# Altium PCB LED_v2.PcbDoc
Units mm, origin at the board's own origin, x right, y up, seen from the top; angles counter-clockwise.
Board outline 120 x 30 mm, 2 copper layers (Top Layer, Bottom Layer), stack 1.58 mm thick; 51 components, 38 nets, 139 pads, 151 vias.
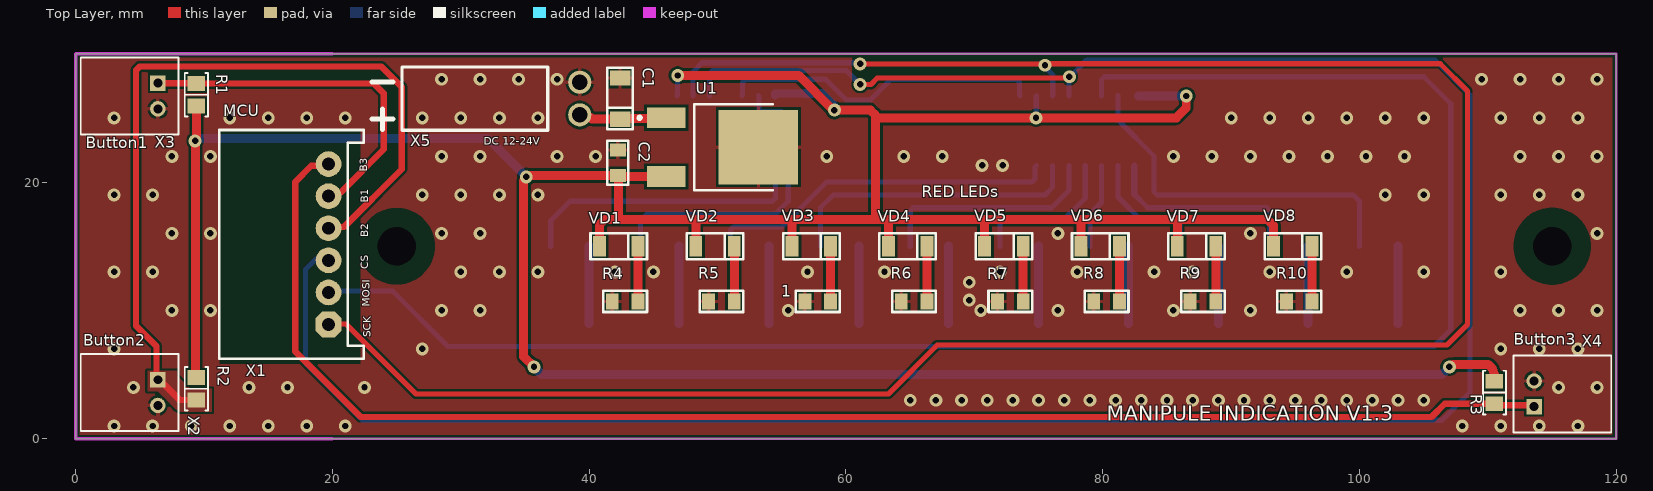
[diagram p0: Top Layer view]
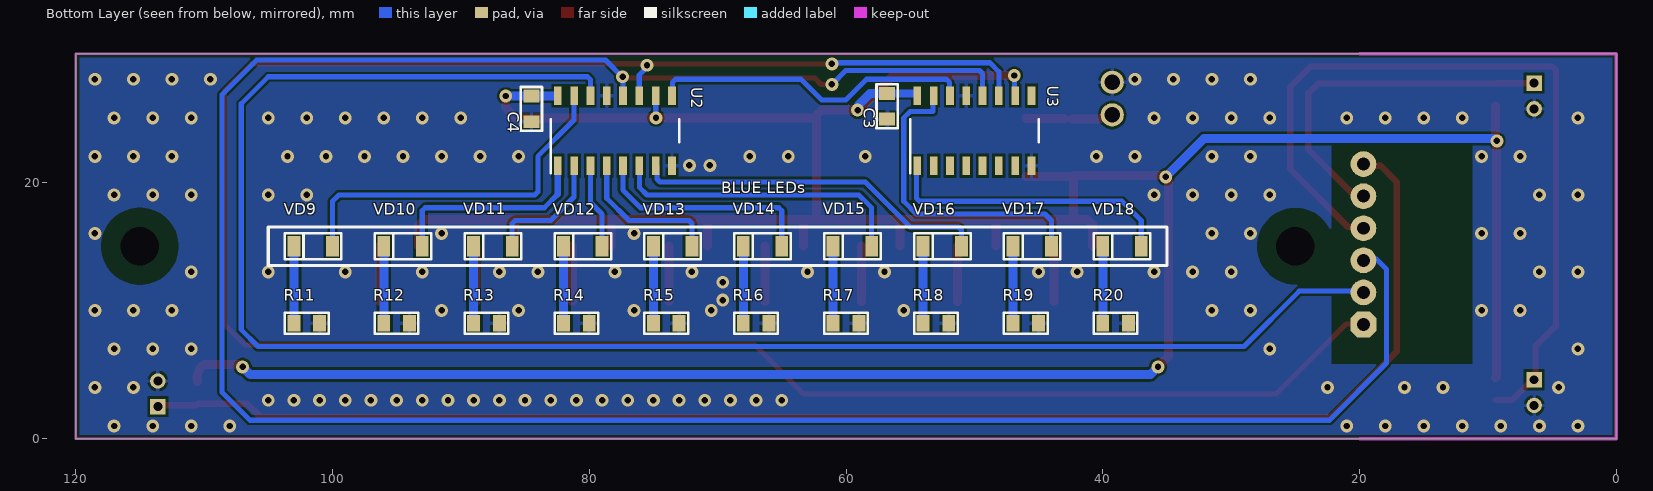
[diagram p1: Bottom Layer view, seen from below]
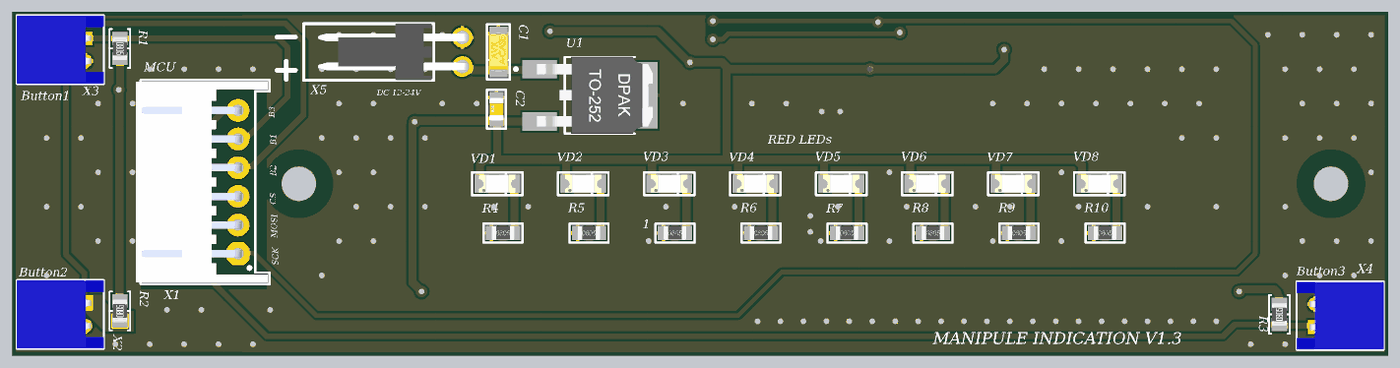
[diagram p2: 3D render of the assembled board from above, using the file's embedded part models]
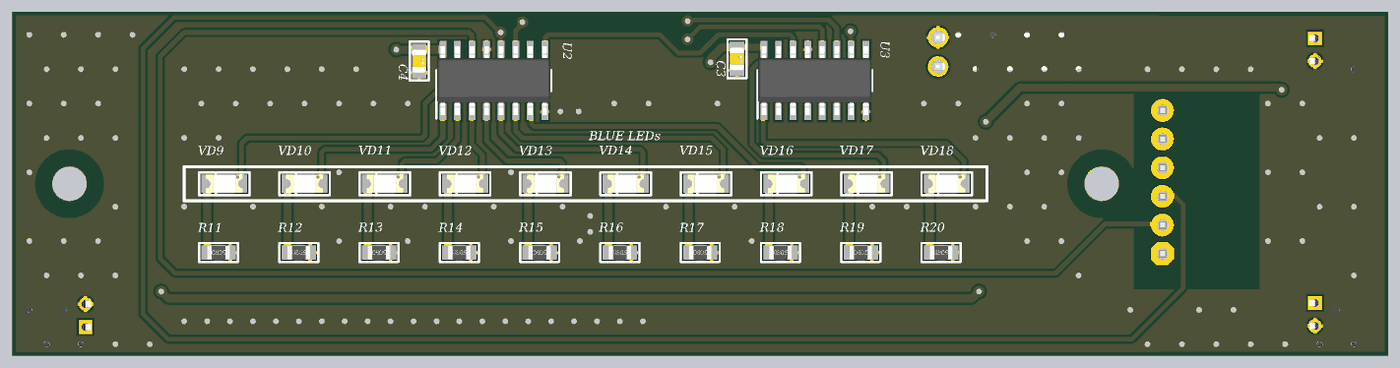
[diagram p3: 3D render of the assembled board from below, using the file's embedded part models]

## Layer stack, top to bottom
Top Solder: solder mask 0.0102, Solder Resist, Dk 3.5
Top Layer: signal copper 0.0356
Dielectric 1: dielectric 1.509, FR-4, Dk 4.8
Bottom Layer: signal copper 0.0356
Bottom Solder: solder mask 0.0102, Solder Resist, Dk 3.5

## Board outline
0,0 120,0 120,30 0,30

## Design rules (kind name [scope] priority, off if disabled: settings)
BoardOutlineClearance [All] p1: gap=0.3 ignorepadtopadclearanceinfootprint=FALSE
Clearance Pad_clearance [(ObjectKind = 'Pad') And (PadViaLibraryTemplate = 'c152h300')] p1: gap=1.5 ignorepadtopadclearanceinfootprint=FALSE except(0: Arc-Hole Track-Hole SMDPad-Hole THPad-Hole Via-Hole Fill-Hole Poly-Hole Region-Hole Text-Hole)
Clearance Clearance_MultiLayerPad [OnLayer('Multi-Layer') and IsPad] p2: gap=0.2 ignorepadtopadclearanceinfootprint=FALSE except(0: Arc-Hole Track-Hole SMDPad-Hole THPad-Hole Via-Hole Fill-Hole Poly-Hole Region-Hole Text-Hole)
Clearance Clearance_Polygon [InPolygon] p3: gap=0.2 ignorepadtopadclearanceinfootprint=FALSE except(0: Arc-Hole Track-Hole SMDPad-Hole THPad-Hole Via-Hole Fill-Hole Poly-Hole Region-Hole Text-Hole)
Clearance [All] p4: gap=0.2 ignorepadtopadclearanceinfootprint=FALSE except(0: Arc-Hole Track-Hole SMDPad-Hole THPad-Hole Via-Hole Fill-Hole Poly-Hole Region-Hole Text-Hole)
ComponentClearance [All] p1: gap=0.5 collisioncheckmode=3 verticalgap=0.5 showdistances=FALSE
DiffPairsRouting [All] p1: maxlimit=0.4 minlimit=0.15 mostfreqgap=0.3 toplayer_minwidth=0.15 toplayer_maxwidth=0.3 toplayer_prefwidth=0.15 bottomlayer_minwidth=0.15 bottomlayer_maxwidth=0.3 bottomlayer_prefwidth=0.15 maxuncoupledlength=12.7
Height [All] p1: minheight=0 maxheight=50 prefheight=12.7
HoleSize [All] p1: absolutevalues=TRUE maxlimit=10 minlimit=0.3 maxpercent=80.000 minpercent=20.000
HoleToHoleClearance [All] p1: gap=0.3 allowstackedmicrovias=TRUE
MinimumSolderMaskSliver [All] p1: minsoldermaskwidth=0.2
PlaneClearance [All] p1: clearance=0.5
PlaneConnect [All] p1: planeconnectstyle=Relief reliefexpansion=0.5 reliefentries=4 reliefconductorwidth=0.3 reliefairgap=0.2
PolygonConnect PolygonConnect_PadGND [InNet('GND') and IsPad] p1: connectstyle=Relief reliefconductorwidth=0.3 reliefentries=4 polygonreliefangle="90 Angle" airgapwidth=0.2
PolygonConnect PolygonConnect_Via [IsVia] p2: connectstyle=Direct reliefconductorwidth=0.254 reliefentries=4 polygonreliefangle="90 Angle" airgapwidth=0.254
PolygonConnect [All] p3: connectstyle=Direct reliefconductorwidth=0.3 reliefentries=4 polygonreliefangle="90 Angle" airgapwidth=0.2
RoutingVias [All] p1: holewidth=0.3 width=0.7 viastyle="Through Hole" minholewidth=0.3 minwidth=0.6 maxholewidth=0.5 maxwidth=1.2
SilkToSolderMaskClearance [IsPad] p1: minsilkscreentomaskgap=0.2 clearancetoexposedcopper=TRUE
SolderMaskExpansion [All] p1: expansion=0.075 istentingtop=FALSE
Width [All] p1: maxlimit=10 minlimit=0.15 preferedwidth=0.15
21 further rules are at their usual default settings.

## Components (designator, comment, footprint, x,y, rotation, side; value= is the part's Value field where it differs from the comment)
1 "Resistor film, 100R, ±5%, 0201, 0.05W, -55...+125°C" "RES: 0805" 57.8,10.7 r0 top value=100R
C1 "Tantalum capacitor, 0.47μF, 6.3V, ±10%, 2Ohm, case A (3216), -55...+125°C" "CAP: TANTAL-A" 42.4,26.5 r90 top value=0.47μF
C2 "Ceramic capacitor, 0.1μF, X7R, ±10%, 16V, 0201, -55...+125°C" "CAP: 0805" 42.225,21.5 r90 top value=0.1μF
C3 "Ceramic capacitor, 0.1μF, X7R, ±10%, 16V, 0201, -55...+125°C" "CAP: 0805" 56.8,25.9 r270 bottom value=0.1μF
C4 "Ceramic capacitor, 0.1μF, X7R, ±10%, 16V, 0201, -55...+125°C" "CAP: 0805" 84.5,25.7 r270 bottom value=0.1μF
R1 "10 kOhms" "RES 0805_2012" 9.4,26.8 r270 top
R2 "10 kOhms" "RES 0805_2012" 9.4,3.9 r90 top
R3 "10 kOhms" "RES 0805_2012" 110.5,3.6 r90 top
R4 "Resistor film, 100R, ±5%, 0201, 0.05W, -55...+125°C" "RES: 0805" 42.8,10.7 r0 top value=100R
R5 "Resistor film, 100R, ±5%, 0201, 0.05W, -55...+125°C" "RES: 0805" 50.3,10.7 r0 top value=100R
R6 "Resistor film, 100R, ±5%, 0201, 0.05W, -55...+125°C" "RES: 0805" 65.3,10.7 r0 top value=100R
R7 "Resistor film, 100R, ±5%, 0201, 0.05W, -55...+125°C" "RES: 0805" 72.8,10.7 r0 top value=100R
R8 "Resistor film, 100R, ±5%, 0201, 0.05W, -55...+125°C" "RES: 0805" 80.3,10.7 r0 top value=100R
R9 "Resistor film, 100R, ±5%, 0201, 0.05W, -55...+125°C" "RES: 0805" 87.8,10.7 r0 top value=100R
R10 "Resistor film, 100R, ±5%, 0201, 0.05W, -55...+125°C" "RES: 0805" 95.3,10.7 r0 top value=100R
R11 "Resistor film, 100R, ±5%, 0201, 0.05W, -55...+125°C" "RES: 0805" 102,9 r180 bottom value=100R
R12 "Resistor film, 100R, ±5%, 0201, 0.05W, -55...+125°C" "RES: 0805" 95,9 r180 bottom value=100R
R13 "Resistor film, 100R, ±5%, 0201, 0.05W, -55...+125°C" "RES: 0805" 88,9 r180 bottom value=100R
R14 "Resistor film, 100R, ±5%, 0201, 0.05W, -55...+125°C" "RES: 0805" 81,9 r180 bottom value=100R
R15 "Resistor film, 100R, ±5%, 0201, 0.05W, -55...+125°C" "RES: 0805" 74,9 r180 bottom value=100R
R16 "Resistor film, 100R, ±5%, 0201, 0.05W, -55...+125°C" "RES: 0805" 67,9 r180 bottom value=100R
R17 "Resistor film, 100R, ±5%, 0201, 0.05W, -55...+125°C" "RES: 0805" 60,9 r180 bottom value=100R
R18 "Resistor film, 100R, ±5%, 0201, 0.05W, -55...+125°C" "RES: 0805" 53,9 r180 bottom value=100R
R19 "Resistor film, 100R, ±5%, 0201, 0.05W, -55...+125°C" "RES: 0805" 46,9 r180 bottom value=100R
R20 "Resistor film, 100R, ±5%, 0201, 0.05W, -55...+125°C" "RES: 0805" 39,9 r180 bottom value=100R
U1 "IC_ON_Semi_MC7805BDTG_eec" ON_Semi_CASE_369C_0 51.215,22.715 r270 top
U2 "" D0016A_N 78,24 r90 bottom value=Value
U3 "" D0016A_N 50,24 r90 bottom value=Value
VD1 "LED, RED, *, *, *, -55...+150°C" "LED: 1206R" 42.3,15 r0 top
VD2 "LED, RED, *, *, *, -55...+150°C" "LED: 1206R" 49.8,15 r0 top
VD3 "LED, RED, *, *, *, -55...+150°C" "LED: 1206R" 57.3,15 r0 top
VD4 "LED, RED, *, *, *, -55...+150°C" "LED: 1206R" 64.8,15 r0 top
VD5 "LED, RED, *, *, *, -55...+150°C" "LED: 1206R" 72.3,15 r0 top
VD6 "LED, RED, *, *, *, -55...+150°C" "LED: 1206R" 79.8,15 r0 top
VD7 "LED, RED, *, *, *, -55...+150°C" "LED: 1206R" 87.3,15 r0 top
VD8 "LED, RED, *, *, *, -55...+150°C" "LED: 1206R" 94.8,15 r0 top
VD9 "LED, BLUE, *, *, *, -55...+150°C" "LED: 1206B" 101.5,15 r0 bottom
VD10 "LED, BLUE, *, *, *, -55...+150°C" "LED: 1206B" 94.5,15 r0 bottom
VD11 "LED, BLUE, *, *, *, -55...+150°C" "LED: 1206B" 87.5,15 r0 bottom
VD12 "LED, BLUE, *, *, *, -55...+150°C" "LED: 1206B" 80.5,15 r0 bottom
VD13 "LED, BLUE, *, *, *, -55...+150°C" "LED: 1206B" 73.5,15 r0 bottom
VD14 "LED, BLUE, *, *, *, -55...+150°C" "LED: 1206B" 66.5,15 r0 bottom
VD15 "LED, BLUE, *, *, *, -55...+150°C" "LED: 1206B" 59.5,15 r0 bottom
VD16 "LED, BLUE, *, *, *, -55...+150°C" "LED: 1206B" 52.5,15 r0 bottom
VD17 "LED, BLUE, *, *, *, -55...+150°C" "LED: 1206B" 45.5,15 r0 bottom
VD18 "LED, BLUE, *, *, *, -55...+150°C" "LED: 1206B" 38.5,15 r0 bottom
X1 "Connector, 6pin, 2.54mm, 250VAC, 3A" "CON: CWF-6R" 19.7,15.15 r90 top
X2 "Connector, 2pin, 2.54mm, 250VAC, 3A" MW-2MR 6.4,3.6 r0 top
X3 "Connector, 2pin, 2.54mm, 250VAC, 3A" MW-2MR 6.4,26.7 r0 top
X4 "Connector, 2pin, 2.54mm, 250VAC, 3A" MW-2MR 113.6,3.5 r180 top
X5 "171857-0002" 171857-0002 33.6,26.5 r90 top

## Footprints (in the part's own frame and the unit in brackets; to place one, negate y for a bottom-side part, rotate by r counter-clockwise, add the part's x,y. Pads: shape width x height; smd on the part's side, far side on the other; paste and mask are expansions set on the pad)
171857-0002 [mm]
  round 1.8 hole 1.19: 1(-1.27,-5.66) 2(1.27,-5.66)
  silkscreen extent -2.46,-3.18 2.46,8.18, body extent -2.46,-6.04 2.46,6.92, height 6.27
"CAP: 0805" [mm]
  rect 1x1.25 smd: 1(-1,0) 2(1,0)
  silkscreen extent -1.7,-0.82 1.7,0.82, body extent -1,-0.62 1,0.63, height 0.78
"CAP: TANTAL-A" [mm]
  rect 1.2x1.6 smd: 1(-1.6,0) 2(1.6,0)
  silkscreen extent -2.4,-1 2.4,1, body extent -1.7,-0.84 1.7,0.84, height 1.71
"CON: CWF-6R" [mm]
  oct 2x2 hole 1: 1(-6.25,0)
  round 2 hole 1: 2(-3.75,0) 3(-1.25,0) 4(1.25,0) 5(3.75,0) 6(6.25,0)
  round 0.5 on Mech1: ""(-8.2,-2.1)
  round 0.5 on Top Overlay: ""(-7.5,-1)
  silkscreen extent -8.9,-2.75 8.9,8.5, body extent -8.75,-2.6 8.75,8.9, height 5.85
D0016A_N [mm]
  rect 1.45x0.6 smd paste+0 mask+0.051: 1(-2.725,4.445) 2(-2.725,3.175) 3(-2.725,1.905) 4(-2.725,0.635) 5(-2.725,-0.635) 6(-2.725,-1.905) 7(-2.725,-3.175) 8(-2.725,-4.445) 9(2.725,-4.445) 10(2.725,-3.175) 11(2.725,-1.905) 12(2.725,-0.635) 13(2.725,0.635) 14(2.725,1.905) 15(2.725,3.175) 16(2.725,4.445)
  silkscreen extent -3.3,-5 0.9,5, body extent -3.01,-4.95 3.01,4.95, height 1.75
"LED: 1206B" [mm]
  rect 1x1.6 smd: 1(-1.5,0) 2(1.5,0)
  silkscreen extent -2.2,-1 2.2,1, body extent -1.6,-0.8 1.6,0.8, height 1.1
"LED: 1206R" [mm]
  rect 1x1.6 smd: 1(-1.5,0) 2(1.5,0)
  silkscreen extent -2.2,-1 2.2,1, body extent -1.6,-0.8 1.6,0.8, height 1.1
MW-2MR [mm]
  rect 1.2x1.2 hole 0.7: 1(0,1)
  round 1.2 hole 0.7: 2(0,-1)
  silkscreen extent -6,-3 1.6,3, body extent -6,-2.95 1.6,2.95, height 4.8
ON_Semi_CASE_369C_0 [mm]
  rect 1.6x3 smd paste+0 mask+0: 1(-2.285,-5.215) 3(2.285,-5.215)
  rect 5.8x6.2 smd paste+0 mask+0: 4(0,1.965)
  silkscreen extent -3.34,-7.41 3.34,3.07, body extent -3.37,-5.46 3.37,4.64, height 2.37
"RES 0805_2012" [mm] "Chip Resistor, 2-Leads, Body 2.00x1.25mm, IPC Medium Density"
  rect 1.15x1.35 smd: 1(-0.875,0) 2(0.875,0)
  silkscreen extent -1.7,-0.9 1.7,0.9, body extent -1,-0.62 1,0.63, height 0.6
"RES: 0805" [mm]
  rect 1x1.25 smd: 1(-1,0) 2(1,0)
  silkscreen extent -1.7,-0.82 1.7,0.82, body extent -1,-0.6 1,0.6, height 0.48

## Part data
1 R4 R5 R6 R7 R8 R9 R10 R11 R12 R13 R14 R15 R16 R17 R18 R19 R20: library part Resistor, Manufacturer=Yageo, Package=0201, PartNumber=RC0201JR-07100RL, Power=0.05W, Temperature=-55...+125°C, Tolerance=±5%, TypeResistor="Resistor film", HelpURL=https://www.digikey.com/product-detail/en/yageo/RC0201JR-07100RL/311-100NCT-ND/1949006, ValueManufacturerPartNumber="Resistor film, 100R, ±5%, 0201, 0.05W, -55...+125°C"
C1: library part Tantal, Manufacturer=AVX, Package="case A (3216)", PartNumber=F930J107KAAAJ6, Temperature=-55...+125°C, Tolerance=±10%, TypeCapacitor="Tantalum capacitor", TypeDielectric=X7R, Voltage=6.3V, HelpURL=https://www.digikey.com/product-detail/en/avx-corporation/F930J107KAAAJ6/478-12404-1-ND/9645231, Impedance=2Ohm, ValueManufacturerPartNumber="Tantalum capacitor, 0.47μF, 6.3V, ±10%, 2Ohm, case A (3216), -55...+125°C"
C2 C3 C4: library part Ceramic, Manufacturer=Yageo, Package=0201, PartNumber=CC0201KRX7R7BB103, Temperature=-55...+125°C, Tolerance=±10%, TypeCapacitor="Ceramic capacitor", TypeDielectric=X7R, Voltage=16V, HelpURL=https://www.digikey.com/product-detail/en/yageo/CC0201KRX7R7BB103/311-1404-1-ND/2833710, ValueManufacturerPartNumber="Ceramic capacitor, 0.1μF, X7R, ±10%, 16V, 0201, -55...+125°C"
R1 R2 R3: library part RT0805DRD0710KL, "RES SMD 10K OHM 0.5% 1/8W 0805", Device Package="0805 (2012 Metric)", Manufacturer=Yageo, Operating Temperature="-55°C ~ 155°C", Power (Watts)="0.125W, 1/8W", Supplier Device Package=0805, Supplier Part Number 1=311-2699-1-ND, Temperature Coefficient=±25ppm/°C, Tolerance=±0.5%, ComponentLink1Description=Datasheet, ComponentLink1URL=https://www.yageo.com/upload/media/product/productsearch/datasheet/rchip/PYu-RT_1-to-0.01_RoHS_L_11.pdf, ComponentLink2Description="DigiKey Link", ComponentLink2URL=http://digikey.com/product-detail/en/yageo/RT0805DRD0710KL/311-2699-1-ND/6129118, Composition="Thin Film", Height - Seated (Max)="0.024\" (0.60mm)", LastUpdated="02.09.2020 01:15:24", Lifecycle Status=Active, Minimum Order=1, Number of Terminations=2, Package / Case="0805 (2012 Metric)", Packaging=TapeAndReel, Part Number=RT0805DRD0710KL, Part Status=Active, PartId=27797, Price=0.03, Resistance="10 kOhms", Series=RT, Size / Dimension="0.079\" L x 0.049\" W (2.00mm x 1.25mm)", Supplier 1=DigiKey
U1: "IC REG LINEAR 5V 1A DPAK-3", Digikey Part Number=MC7805BDTGOS-ND, Manufacturer="ON Semi", Mfg Package Ident="CASE 369C", Mouser Part Number=863-MC7805BDTG, Part Number=MC7805BDTG, Temperature="-40°C to +125°C", Temperature Range High=+125°C, Temperature Range Low=-40°C, ComponentLink1Description=Upverter, ComponentLink1URL=https://upverter.com/upn/revision/fe0024d15b1aad39/, ComponentLink2Description=Datasheet, ComponentLink2URL=https://www.onsemi.com/pub/Collateral/MC7800-D.PDF, Digikey Description="IC REG LINEAR 5V 1A DPAK-3", HelpURL=https://upverter.com/upn/revision/fe0024d15b1aad39/, Lead Free=yes, Package="CASE 369C", RoHS=TRUE, Supplier 1=Digi-Key, Supplier 2=Mouser, Supplier Part Number 1=MC7805BDTGOS-ND, Supplier Part Number 2=863-MC7805BDTG
U2 U3: library part SN74HC595D, "No Description Available", Manufacturer="Texas Instruments", PartNumber=SN74HC595DR, Copyright="Copyright (C) 2021 Accelerated Designs. All rights reserved", RefDes=RefDes, Type=DEV
VD1 VD2 VD3 VD4 VD5 VD6 VD7 VD8: library part LED_single, Color=RED, Temperature=-55...+150°C, ColorParameter=RED, TypeDiode=LED, ValueManufacturerPartNumber="LED, RED, *, *, *, -55...+150°C"
VD9 VD10 VD11 VD12 VD13 VD14 VD15 VD16 VD17 VD18: library part LED_single, Color=BLUE, Temperature=-55...+150°C, ColorParameter=BLUE, TypeDiode=LED, ValueManufacturerPartNumber="LED, BLUE, *, *, *, -55...+150°C"
X1: library part CWF-6, CurrentMax=3A, Manufacturer=Connfly, PartNumber=CWF-6R, VoltageMax=250VAC, CommentText="\"Разъем\"", HelpURL=https://www.chipdip.ru/product/cwf-6r-ds1069-6-mr, Multichannel=6pin, Pitch=2.54mm, TypeConnector=Connector, ValueManufacturerPartNumber="Connector, 6pin, 2.54mm, 250VAC, 3A"
X2 X3 X4: library part CWF-2, CurrentMax=3A, Manufacturer=Connfly, PartNumber=CWF-2R, VoltageMax=250VAC, CommentText="\"Разъем\"", HelpURL=https://www.chipdip.ru/product/cwf-2r-ds1069-2-mr, Multichannel=2pin, Pitch=2.54mm, TypeConnector=Connector, ValueManufacturerPartNumber="Connector, 2pin, 2.54mm, 250VAC, 3A"
X5: "Connector", Manufacturer_Name=Molex, Mouser Part Number=538-171857-0002, Datasheet Link=http://www.molex.com/webdocs/datasheets/pdf/en-us//1718570002_PCB_HEADERS.pdf, Manufacturer_Part_Number=171857-0002, Mouser Price/Stock=https://www.mouser.co.uk/ProductDetail/Molex/171857-0002?qs=vOeJqewp7jDZ%2FeRg0MxvZQ%3D%3D

## Free pads (board coordinates)
  round 1.524 hole 3: 1(25,15) 1(115,15)

## Via types
v1: diameter 1, hole 0.5, Top Layer to Bottom Layer, tented both sides, 151 vias

## Nets (pads, with @x,y where several pads share a name; then routed paths per layer and width w, separated by ;. In a path a pad name is that pad's centre, name@x,y a point inside that pad or via, vN(x,y) a via of type N, cw(c..) or ccw(c..) an arc to the next point about the centre after c; other vN are vias at no path point)
5V: C2.1 C3.1 C4.1 R1.2 R2.2 R3.2 U1.3 U2.10 U2.16 U3.10 U3.16 VD1.1 VD2.1 VD3.1 VD4.1 VD5.1 VD6.1 VD7.1 VD8.1 | length 285.9
  Top Layer w0.7: R2.2 9.35,4.825 9.35,23.15 v1(9.3,23.2) 9.3,23.281 9.4,23.381 9.4,25.7 R1.2 ; v1(35.7,5.6) 34.9,6.4 34.9,20.09 35.31,20.5 C2.1 ; VD1.1 40.8,16.69 41.21,17.1 42.3,17.1 ; C2.1@42.225,20.43 U1.3 ; C2.1@42.3,20.35 42.3,17.1 ; v1(46.9,28.3) 56.319,28.3 59.019,25.6 v1(59.1,25.6) 61.89,25.6 62.3,25.19 62.3,25 ; VD2.1 48.3,17 48.2,17.1 ; VD3.1 55.8,17 55.7,17.1 ; VD4.1 63.3,17 63.2,17.1 ; VD5.1 70.8,17 70.9,17.1 ; VD6.1 78.3,17.1 ; VD7.1 85.8,17 85.9,17.1 ; v1(86.5,26.7) 86.5,25.775 85.725,25 v1(74.8,25) 62.3,25 ; VD8.1 93.3,16.6 92.8,17.1 85.9,17.1 ; v1(107,5.6) 107.081,5.6 107.281,5.8 110.01,5.8 110.32,5.49 110.509,5.002 110.556,4.88 110.556,4.7 R3.2 ; 42.3,17.1 48.2,17.1 ; 48.2,17.1 55.7,17.1 ; 55.7,17.1 62.3,17.1 ; 62.3,17.1 62.3,25 ; 62.3,17.1 63.2,17.1 ; 63.2,17.1 70.9,17.1 ; 70.9,17.1 78.3,17.1 ; 78.3,17.1 85.9,17.1
  Bottom Layer w0.4: U3.10 46.863,26.762 46.863,28.263 v1(46.9,28.3) ; v1(74.8,25) 74.812,25.013 74.812,26.712 U2.10
  Bottom Layer w0.6: U3.16 54.445,26.9 C3.1
  Bottom Layer w0.7: v1(9.3,23.2) 9.381,23.2 9.581,23.4 32.1,23.4 v1(35.1,20.4) ; v1(35.7,5.6) 36.3,5 106.4,5 v1(107,5.6) ; C3.1 58.119,26.9 59.043,25.976 59.043,25.657 v1(59.1,25.6) ; 82.788,26.712 84.488,26.712 C4.1 v1(86.5,26.7)
B1: R2.1 X1.4 X2.1 | length 63.9
  Top Layer w0.5: R2.1 8.111,3.025 6.886,4.25 6.75,4.25 6.3,4.7 6.3,7.2 4.7,8.8 4.7,28.707 4.993,29 23.8,29 25.4,27.4 25.4,21 20.9,16.5 X1.4@19.7,16.5
B2: R1.1 X1.5 X3.1 | length 28.1
  Top Layer w0.5: X3.1 6.413,27.687 9.387,27.687 R1.1 23.225,27.675 24,26.9 24,22.544 20.643,19.187 19.987,19.187 X1.5
BREV: R3.1 X1.6 X4.1 | length 115.5
  Top Layer w0.5: X1.6 19.563,21.263 18.363,21.263 17.1,20 17.1,6.8 22.2,1.7 105.6,1.7 106.625,2.725 R3.1 110.612,2.613 113.487,2.613 X4.1
GND: 1.1 C1.2 C2.2 C3.2 C4.2 R4.1 R5.1 R6.1 R7.1 R8.1 R9.1 R10.1 R11.2 R12.2 R13.2 R14.2 R15.2 R16.2 R17.2 R18.2 R19.2 R20.2 U1.4 U2.8 U2.13 U3.8 U3.13 X2.2 X3.2 X4.2 X5.2
  other v1: 3,1 6,1 9,1 12,1 15,1 18,1 21,1 108,1 111,1 114,1 117,1 65,3 67,3 69,3 71,3 73,3 75,3 77,3 79,3 81,3 83,3 85,3 87,3 89,3 91,3 93,3 95,3 97,3 99,3 101,3 103,3 105,3 4.5,4 13.5,4 16.5,4 22.5,4 115.5,4 118.5,4 3,7 27,7 111,7 114,7 117,7 7.5,10 10.5,10 28.5,10 31.5,10 55.5,10 70.5,10 76.5,10 85.5,10 91.5,10 112.5,10 115.5,10 118.5,10 69.6,10.8 69.6,12.2 3,13 6,13 30,13 33,13 36,13 42,13 45,13 57,13 63,13 72,13 78,13 84,13 87,13 93,13 99,13 105,13 111,13 7.5,16 10.5,16 28.5,16 31.5,16 76.5,16 91.5,16 118.5,16 3,19 6,19 27,19 30,19 33,19 36,19 102,19 105,19 111,19 114,19 117,19 70.6,21.3 72.2,21.3 7.5,22 10.5,22 28.5,22 31.5,22 37.5,22 40.5,22 58.5,22 64.5,22 67.5,22 85.5,22 88.5,22 91.5,22 94.5,22 97.5,22 100.5,22 103.5,22 112.5,22 115.5,22 118.5,22 3,25 12,25 15,25 18,25 21,25 27,25 30,25 33,25 36,25 90,25 93,25 96,25 99,25 102,25 105,25 111,25 114,25 117,25 28.5,28 31.5,28 34.5,28 37.5,28 109.5,28 112.5,28 115.5,28 118.5,28
Net1_2: 1.2 VD3.2 | length 4.3
  Top Layer w0.7: 1.2 VD3.2
NetC1_1: C1.1 U1.1 X5.1 | length 6.3
  Top Layer w0.7: X5.1 39.47,25.02 40.101,25.02 40.22,24.9 C1.1 ; C1.1@43,24.9 43.05,24.95 45.95,24.95 U1.1
NetR4_2: R4.2 VD1.2 | length 4.3
  Top Layer w0.7: R4.2 VD1.2
NetR5_2: R5.2 VD2.2 | length 4.3
  Top Layer w0.7: R5.2 VD2.2
NetR6_2: R6.2 VD4.2 | length 4.3
  Top Layer w0.7: R6.2 VD4.2
NetR7_2: R7.2 VD5.2 | length 4.3
  Top Layer w0.7: R7.2 VD5.2
NetR8_2: R8.2 VD6.2 | length 4.3
  Top Layer w0.7: R8.2 VD6.2
NetR9_2: R9.2 VD7.2 | length 4.3
  Top Layer w0.7: R9.2 VD7.2
NetR10_2: R10.2 VD8.2 | length 4.3
  Top Layer w0.7: R10.2 VD8.2
NetR11_1: R11.1 VD9.2 | length 6
  Bottom Layer w0.7: R11.1 VD9.2
NetR12_1: R12.1 VD10.2 | length 6
  Bottom Layer w0.7: R12.1 VD10.2
NetR13_1: R13.1 VD11.2 | length 6
  Bottom Layer w0.7: R13.1 VD11.2
NetR14_1: R14.1 VD12.2 | length 6
  Bottom Layer w0.7: R14.1 VD12.2
NetR15_1: R15.1 VD13.2 | length 6
  Bottom Layer w0.7: R15.1 VD13.2
NetR16_1: R16.1 VD14.2 | length 6
  Bottom Layer w0.7: R16.1 VD14.2
NetR17_1: R17.1 VD15.2 | length 6
  Bottom Layer w0.7: R17.1 VD15.2
NetR18_1: R18.1 VD16.2 | length 6
  Bottom Layer w0.7: R18.1 VD16.2
NetR19_1: R19.1 VD17.2 | length 6
  Bottom Layer w0.7: R19.1 VD17.2
NetR20_1: R20.1 VD18.2 | length 6
  Bottom Layer w0.7: R20.1 VD18.2
NetU2_1: U2.1 VD10.1 | length 16.1
  Bottom Layer w0.4: 82.5,19 83.5,18 92.766,18 93,17.766 VD10.1
  Bottom Layer w0.5: U2.1 82.445,19.055 82.5,19
NetU2_2: U2.2 VD11.1 | length 9.9
  Bottom Layer w0.4: U2.2 81.175,18.825 83,17 85.766,17 86,16.766 VD11.1
NetU2_3: U2.3 VD12.1 | length 6.6
  Bottom Layer w0.4: VD12.1 79,17.5 79.905,18.405 U2.3
NetU2_4: U2.4 VD13.1 | length 11.8
  Bottom Layer w0.4: VD13.1 72,16.766 72.234,17 76.901,17 78.635,18.734 U2.4
NetU2_5: U2.5 VD14.1 | length 17.7
  Bottom Layer w0.4: VD14.1 65,17.766 65.234,18 76,18 77.365,19.365 U2.5
NetU2_6: U2.6 VD15.1 | length 23.4
  Bottom Layer w0.4: VD15.1 58,18 59,19 75.5,19 76.095,19.595 U2.6
NetU2_7: U2.7 VD16.1 | length 27.7
  Bottom Layer w0.4: VD16.1 51,16.266 51.234,16.5 55,16.5 58.5,20 74.491,20 74.725,20.234 74.725,21.175 U2.7
NetU2_9: U2.9 U3.14 | length 25.2
  Bottom Layer w0.4: U3.14 51.938,26.758 51.938,27.766 52.172,28 58.4,28 60,26.4 61.9,26.4 63.5,28 73.288,28 73.522,27.766 73.522,26.758 U2.9
NetU2_15: U2.15 VD9.1 | length 28.5
  Bottom Layer w0.4: U2.15 81.175,24.825 84,22 84,19.234 84.234,19 99.5,19 100,18.5 VD9.1
NetU3_1: U3.1 VD18.1 | length 22.8
  Bottom Layer w0.4: VD18.1 37,17 38.5,18.5 54.266,18.5 54.5,18.734 54.5,21.22 U3.1
NetU3_15: U3.15 VD17.1 | length 24.3
  Bottom Layer w0.4: VD17.1 44,17 44.5,17.5 54.5,17.5 55.5,18.5 55.5,25 55,25.5 53.234,25.5 53.234,26.666 U3.15
RCLK: U2.12 U3.12 X1.3 | length 191
  Top Layer w0.4: v1(61.1,27.6) 61.937,27.6 62.437,28.1 77.3,28.1 v1(77.4,28.2)
  Bottom Layer w0.4: X1.3@19.7,14 18.7,14 17.9,13.2 17.9,5.9 22.35,1.45 106.423,1.45 108.6,3.627 108.6,26.8 105.9,29.5 78.738,29.5 77.438,28.2 v1(77.4,28.2) 77.382,28.182 77.382,26.742 U2.12 ; U3.12 49.365,28.451 49.599,28.685 60.015,28.685 v1(61.1,27.6)
SER: U2.14 X1.2 | length 136.7
  Bottom Layer w0.4: X1.2@19.7,11.5 24.7,11.5 29,7.2 105.8,7.2 107.1,8.5 107.1,26.1 105,28.2 80.139,28.2 79.905,27.966 U2.14
SRCLK: U2.11 U3.11 X1.1 | length 177.5
  Top Layer w0.4: X1.1 19.734,8.934 21.066,8.934 26.5,3.5 63.3,3.5 67.1,7.3 106.8,7.3 108.4,8.9 108.4,27.1 106.285,29.215 75.615,29.215 v1(75.5,29.1) 75.4,29.2 v1(61.1,29.2)
  Bottom Layer w0.4: U3.11 48.095,28.595 48.785,29.285 61.015,29.285 v1(61.1,29.2) ; v1(75.5,29.1) 75.5,28.938 76.098,28.34 76.098,26.727 U2.11
pads on no net: U3.2 U3.3 U3.4 U3.5 U3.6 U3.7 U3.9 X1.

## Polygon pours and split planes (outlines as drawn)
GND on Top Layer "GND_L01_P002" (solid, remove dead copper, pour order 2): 0,30 120,30 120,0 0,0
B1 on Top Layer "B1_L01_P000" (solid, pour order 0): 5.6,5.3 7.9,5.3 7.9,4.9 8.9,3.9 10.6,3.9 10.6,2.1 10.4,2.1 8.2,2.1 7.8,2.3 6.4,3.7 5.6,3.7
GND on Bottom Layer "GND_L02_P003" (solid, remove dead copper, pour order 3): 0,30 120,30 120,0 0,0

## Keep-outs
Keep-Out Layer:
  lines w0.2: 20,0 120,0 120,30 20,30
  lines w0.254: 20,0 0,0 0,30 20,30

## Other copper
Top Layer:
  pour cut-out: 11.2,5.8 22.2,5.8 22.2,24.1 11.2,24.1
  pour cut-out: 60.448,28.93 60.455,28.923 60.455,27.883 76.476,27.883 76.837,28.245 76.837,28.807
Bottom Layer:
  pour cut-out: 11.2,5.8 22.2,5.8 22.2,23.8 11.2,23.8
  pour cut-out: 80.405,25.8 81.945,25.8 81.945,27.65 80.405,27.65
  pour cut-out: 76.075,29.694 78.173,29.694 77.547,29.068 77.547,28.371 76.865,27.689 76.865,25.8 76.595,25.8
  pour cut-out: 60.938,28.519 60.938,28.863 61.769,29.694 74.925,29.694 74.925,28.936 75.69,28.171 75.595,28.077 75.595,25.8 74.055,25.8 74.055,27.766 73.444,28.377 63.3,28.377 61.731,26.808 61.339,26.808

## Silkscreen, mask and mechanical layers (free items; w line width, h text height)
Top Overlay:
  lines w0.4: 23.1,24.9 24.7,24.9 ; 23.1,27.8 24.7,27.8 ; 23.9,24.1 23.9,25.7
  text "MCU" at 11.5,24.818 h1.5
  text "DC 12-24V" at 31.8,22.711 h1
  text "Button1" at 0.8,22.318 h1.5
  text "B3" at 22.888,20.8 h1 r90
  text "RED LEDs" at 65.9,18.517 h1.5
  text "B1" at 23,18.4 h1 r90
  text "B2" at 23,15.7 h1 r90
  text "CS" at 22.989,13.2 h1 r90
  text "MOSI" at 23.088,10.3 h1 r90
  text "SCK" at 23.189,7.9 h1 r90
  text "Button3" at 112,7.018 h1.5
  text "Button2" at 0.6,6.918 h1.5
  text "MANIPULE INDICATION V1.3" at 80.3,1.024 h2
Bottom Overlay:
  lines w0.254: 35,13.5 105,13.5 105,15 105,16.5 35,16.5 35,15 35,13.5
  text "BLUE LEDs" at 69.7,18.818 h1.5

## Dimensions
0,0 to 0,30 on Size
0,30 to 120,30 on Size